# EAGLE board blinkm_mk2a (EAGLE 6.4)
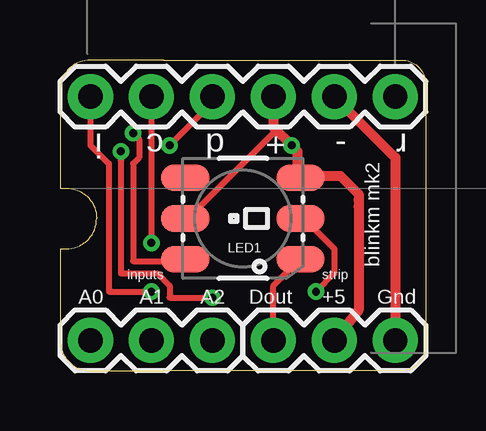
[diagram p0: board, top side]
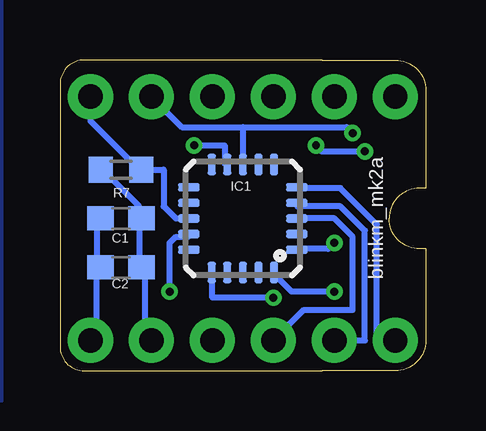
[diagram p1: board, bottom side, seen from below]

Size 15.24 x 12.95 mm. Coordinates in mm from the lower left corner, seen from the top.
Outline: 4.32,12.95 14.22,12.95 arc-90 15.24,11.94 15.24,1.02 arc-90 14.22,0 4.32,0 1.27,0 arc-90 0,1.27 0,5.08 0.25,5.08 arc90 1.52,6.35 arc90 0.25,7.62 0,7.62 0,11.68 arc-90 1.27,12.95 4.32,12.95
Copper layers (1*16): Top 0.0356mm / dielectric 1.5011mm / Bottom 0.0356mm
Design rules "LaenPCBOrder *": minimum track width 10mil, minimum drill 13mil, track to track 6mil, track to pad 8mil, pad to pad 8mil, via to via 8mil, smd to smd 6mil, copper to edge 15mil, drill to drill 8mil, minimum pad ring 7mil, minimum via ring 7mil, stop-mask expansion 4mil, vias tented up to drill 25mil, thermal gap 10mil
tRestrict: area -1.3,3.8 to 0,11.4
bRestrict: area 6.3,5.1 to 8.9,7.6

## Footprints (pad centres in the part's own frame; a part is rotated, then mirrored left to right if it is on the bottom)
C0603 = smd 1.1 x 1: 1 -0.85,0; 2 0.85,0
QFN/MLF20 = smd 0.9 x 0.35: 1 -2.25,1.3; 2 -2.25,0.65; 3 -2.25,0; 4 -2.25,-0.65; 5 -2.25,-1.3; 11 2.25,-1.3; 12 2.25,-0.65; 13 2.25,0; 14 2.25,0.65; 15 2.25,1.3 | smd 0.35 x 0.9: 6 -1.3,-2.25; 7 -0.65,-2.25; 8 0,-2.25; 9 0.65,-2.25; 10 1.3,-2.25; 16 1.3,2.25; 17 0.65,2.25; 18 0,2.25; 19 -0.65,2.25; 20 -1.3,2.25
1X03 = drill 1.016 pad 1.88: 1 0,0; 2 2.54,0; 3 5.08,0
1X06 = drill 1.016 pad 1.88: 1 0,0; 2 2.54,0; 3 5.08,0; 4 7.62,0; 5 10.16,0; 6 12.7,0
LED-TRICOLOR-5050-IC = smd 2 x 1.1: 1 -2.4,1.7; 2 -2.4,0; 3 -2.4,-1.7; 4 2.4,-1.7; 5 2.4,0; 6 2.4,1.7
R0603 = smd 1 x 1.1: 1 -0.85,0; 2 0.85,0

## Placement (x,y rotation side)
C1  100nF  [C0603]  12.7,6.35 180 bottom
C2  10uF  [C0603]  12.7,4.32 180 bottom
IC1  ATTINY24/44/84-MU  [QFN/MLF20]  7.62,6.35 180 bottom
JP1  [1X03]  8.89,1.27 0 top
JP3  [1X06]  13.97,11.43 180 top
JP4  [1X03]  6.35,1.27 180 top
LED1  LED-TRICOLOR-5050-ICWS2811  [LED-TRICOLOR-5050-IC]  7.62,6.35 180 top
R7  10k  [R0603]  12.7,8.38 180 bottom

## Library data of the parts
C1 C2 R7 = rcl
IC1 = attiny24_44_84
JP1 JP4 = SparkFun-20110517
JP3 = SparkFun-Connectors
LED1 = SparkFun-LED

## Nets
+5V: C1.1 C2.1 IC1.9 JP1.2 JP3.3 LED1.3 LED1.5 R7.2
DI: IC1.14 LED1.2
DO: JP1.1 LED1.1
GND: C1.2 C2.2 IC1.8 JP1.3 JP3.2 LED1.6
MISO: IC1.20 JP3.6
N$1: IC1.3 JP4.1
N$2: IC1.4 JP4.2
N$3: IC1.5 JP4.3
RESET: IC1.13 JP3.1 R7.1
SCL: IC1.1 JP3.5
SDA: IC1.16 JP3.4

## Tracks (layer width: path | path; a pad name or v marks a point on that pad's centre or on a via)
+5V  (via drill 0.33)
  Top 0.254: 9.91,9.14 v9.65,9.4 | 9.91,8.13 LED1.3 10.16,8.13 | 8.89,10.16 8.89,9.91 5.33,6.35 LED1.5
  Top 0.406: 9.91,8.13 9.91,9.14 | JP3.3 8.89,10.16 v9.65,9.4 | JP1.2 12.45,2.54 12.45,6.86 | 12.45,7.11 12.45,6.86 | 10.16,8.13 11.68,8.13 12.45,7.37 12.45,6.86
  Bottom 0.254: 11.94,6.35 11.94,4.32 C2.1 11.68,4.32 11.68,1.27 | 11.94,6.35 C1.1 11.94,6.35 | 11.94,6.35 11.94,6.86 13.46,8.38 R7.2 | v9.65,9.4 8.38,9.4 8.38,8.64 IC1.9
  Bottom 0.406: JP1.2 11.68,1.27
DI  (via drill 0.33)
  Top 0.254: v10.67,3.3 11.43,4.06 11.43,5.08 10.16,6.35 LED1.2
  Bottom 0.254: v10.67,3.3 10.67,5.33 10.41,5.59 9.91,5.59 IC1.14
DO
  Top 0.254: JP1.1 8.89,3.56 9.91,4.57 LED1.1
GND  (via drill 0.33)
  Top 0.254: v3.05,9.91 3.3,9.65 3.3,8.89 3.05,8.64 3.05,4.57 5.08,4.57 LED1.6
  Top 0.406: JP1.3 13.97,1.52 13.97,8.89 JP3.2
  Bottom 0.254: 13.72,4.32 13.72,6.35 C1.2 | 13.72,4.32 C2.2 13.72,4.32 | 13.72,1.27 13.72,4.32 | 7.62,8.64 IC1.8 | 7.62,8.64 IC1.8 | 7.62,10.16 7.62,8.64 | 7.62,10.16 10.16,10.16 JP3.2 | 7.62,8.64 IC1.8 | v3.05,9.91 3.3,10.16 7.62,10.16
  Bottom 0.406: JP1.3 13.72,1.27
  pour Bottom: 20.32,16.51 20.32,-1.27 17.78,-1.27 17.78,16.51
MISO  (via drill 0.33)
  Top 0.254: v3.81,3.3 2.03,3.3 2.03,8.64 1.27,9.4 JP3.6
  Bottom 0.254: v3.81,3.3 5.59,3.3 6.35,4.06 IC1.20
N$1
  Bottom 0.254: JP4.1 5.08,2.54 3.05,2.54 3.05,5.59 3.81,6.35 5.33,6.35 IC1.3
N$2
  Bottom 0.254: JP4.2 2.54,1.27 2.54,5.84 3.56,6.86 5.33,6.86 IC1.4
N$3
  Bottom 0.254: JP4.3 2.03,1.27 2.03,6.1 3.56,7.62 5.33,7.62 IC1.5
RESET
  Bottom 0.254: IC1.13 9.91,6.35 10.41,6.35 10.92,6.86 10.92,8.38 11.68,8.38 R7.1 11.94,8.38 13.97,10.41 JP3.1
SCL  (via drill 0.33)
  Top 0.254: JP3.5 v3.81,5.33
  Bottom 0.254: v3.81,5.33 4.06,5.08 5.33,5.08 IC1.1
SDA  (via drill 0.33)
  Top 0.254: v6.35,3.05 4.57,3.05 4.57,3.56 4.06,4.06 2.54,4.06 v2.54,9.14 | v4.57,9.4 6.35,11.18 JP3.4
  Bottom 0.254: v6.35,3.05 8.89,3.05 8.89,4.06 IC1.16 | v2.54,9.14 4.32,9.14 v4.57,9.4

## Text on the board
tPlace: i | c | d | + | - | r | inputs | strip | blinkm mk2 | A0 | A1 | A2 | Dout | +5 | Gnd
bPlace: blinkm_mk2a